# Altium PCB gpa-mgs-485.PcbDoc
Units mm, origin at the board's own origin, x right, y up, seen from the top; angles counter-clockwise.
Board outline 22 x 18 mm, 4 copper layers (Top Layer, Signal Layer 2, Signal Layer 1, Bottom Layer), stack 1.54 mm thick; 30 components, 27 nets, 114 pads, 79 vias.
Unrouted connection lines stored in the file: 3.
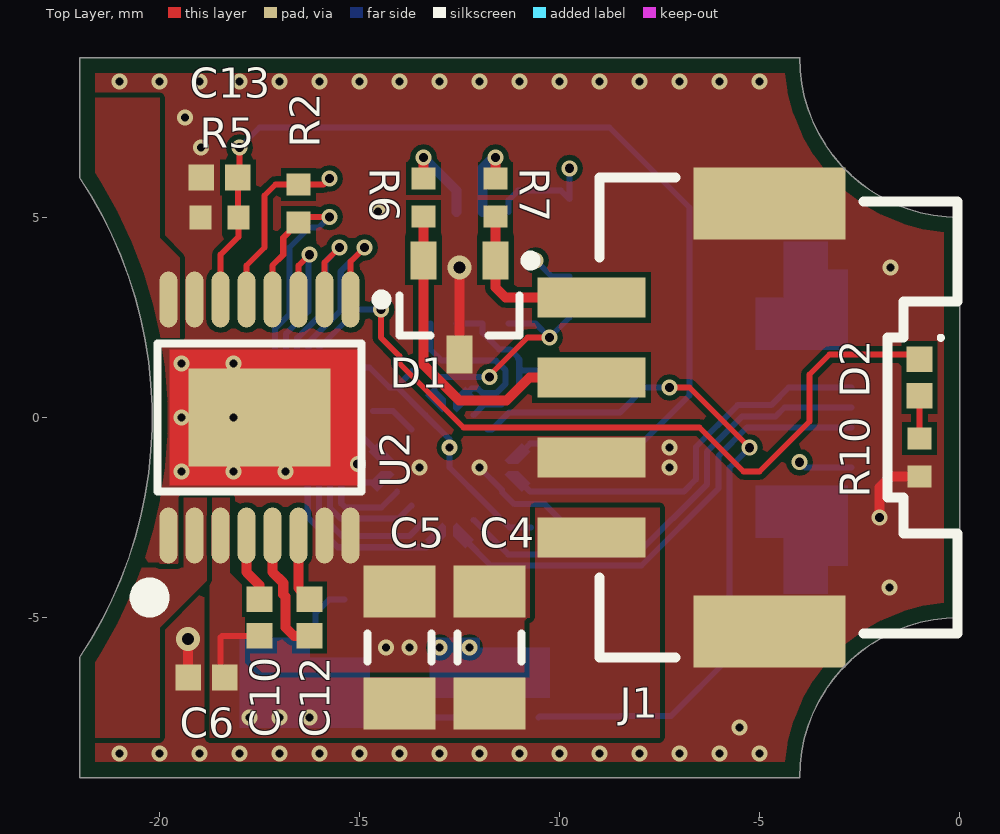
[diagram p0: Top Layer view]
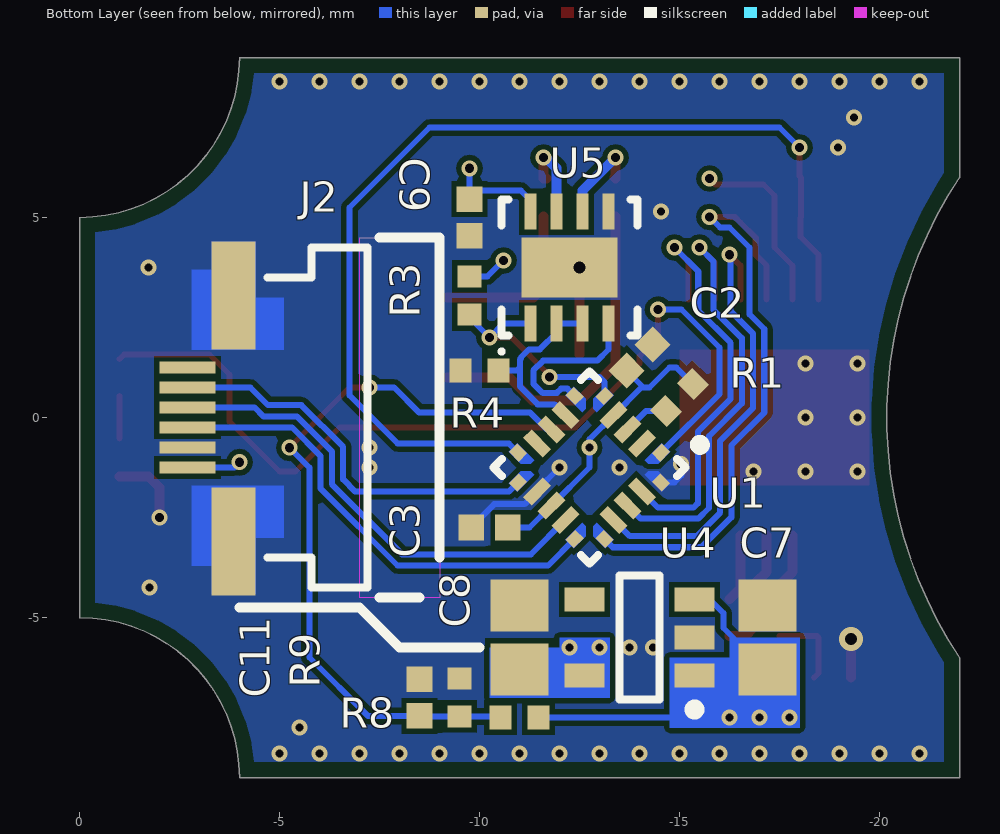
[diagram p1: Bottom Layer view, seen from below]
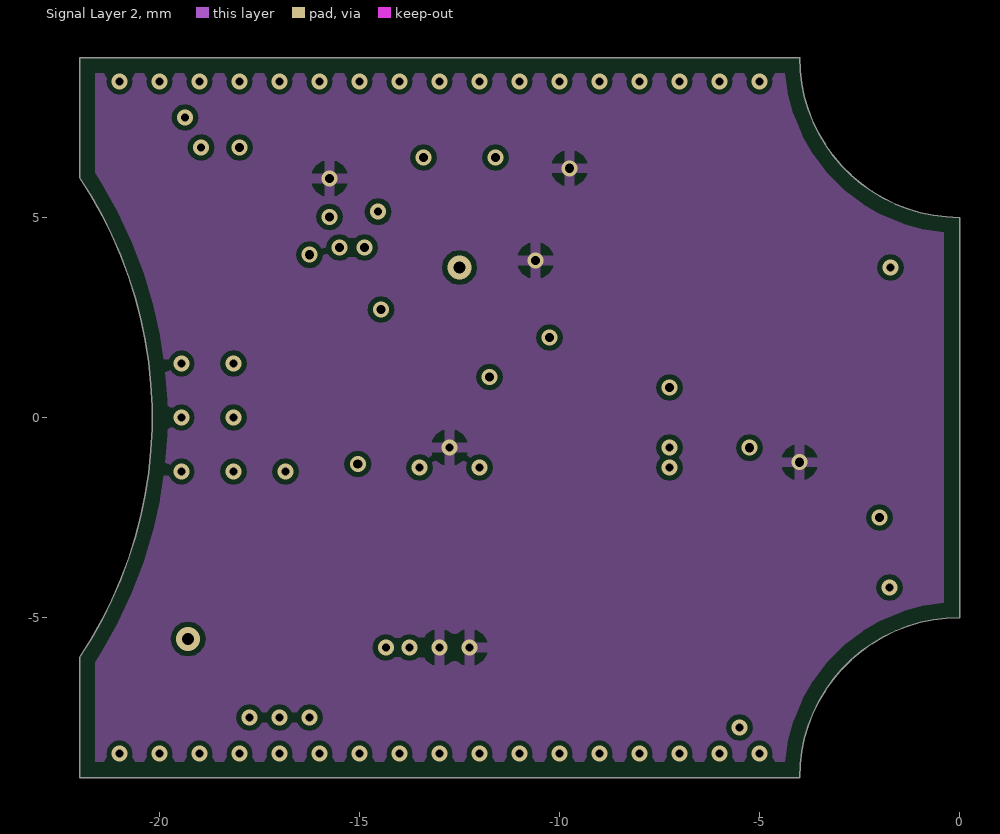
[diagram p2: Signal Layer 2]
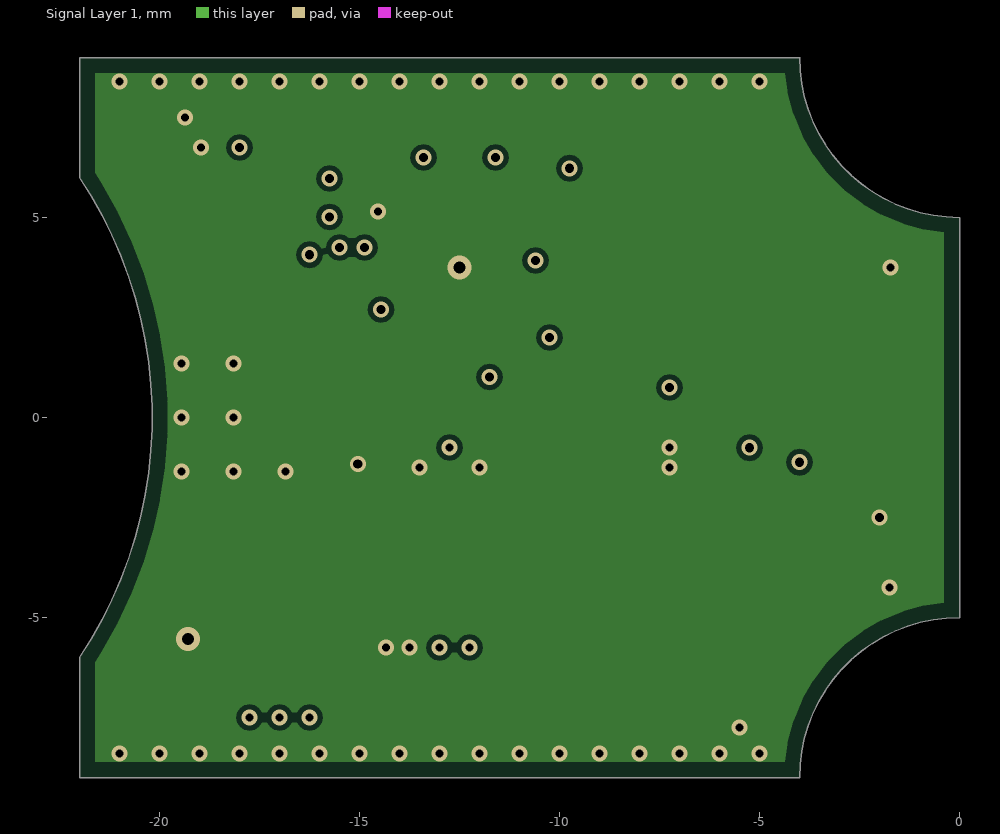
[diagram p3: Signal Layer 1]
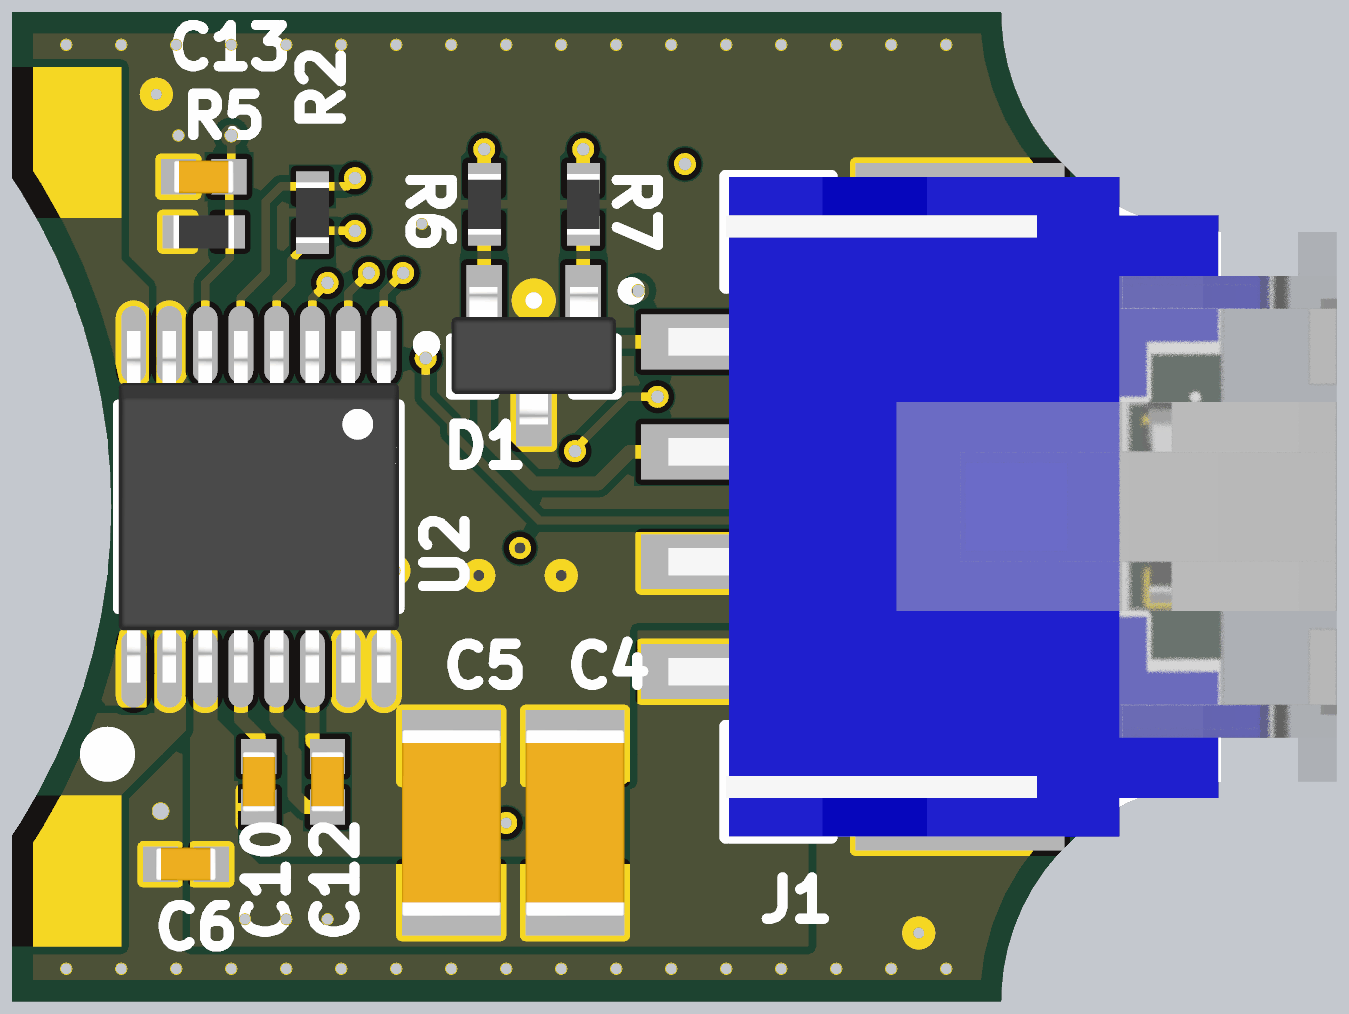
[diagram p4: 3D render of the assembled board from above, using the file's embedded part models]
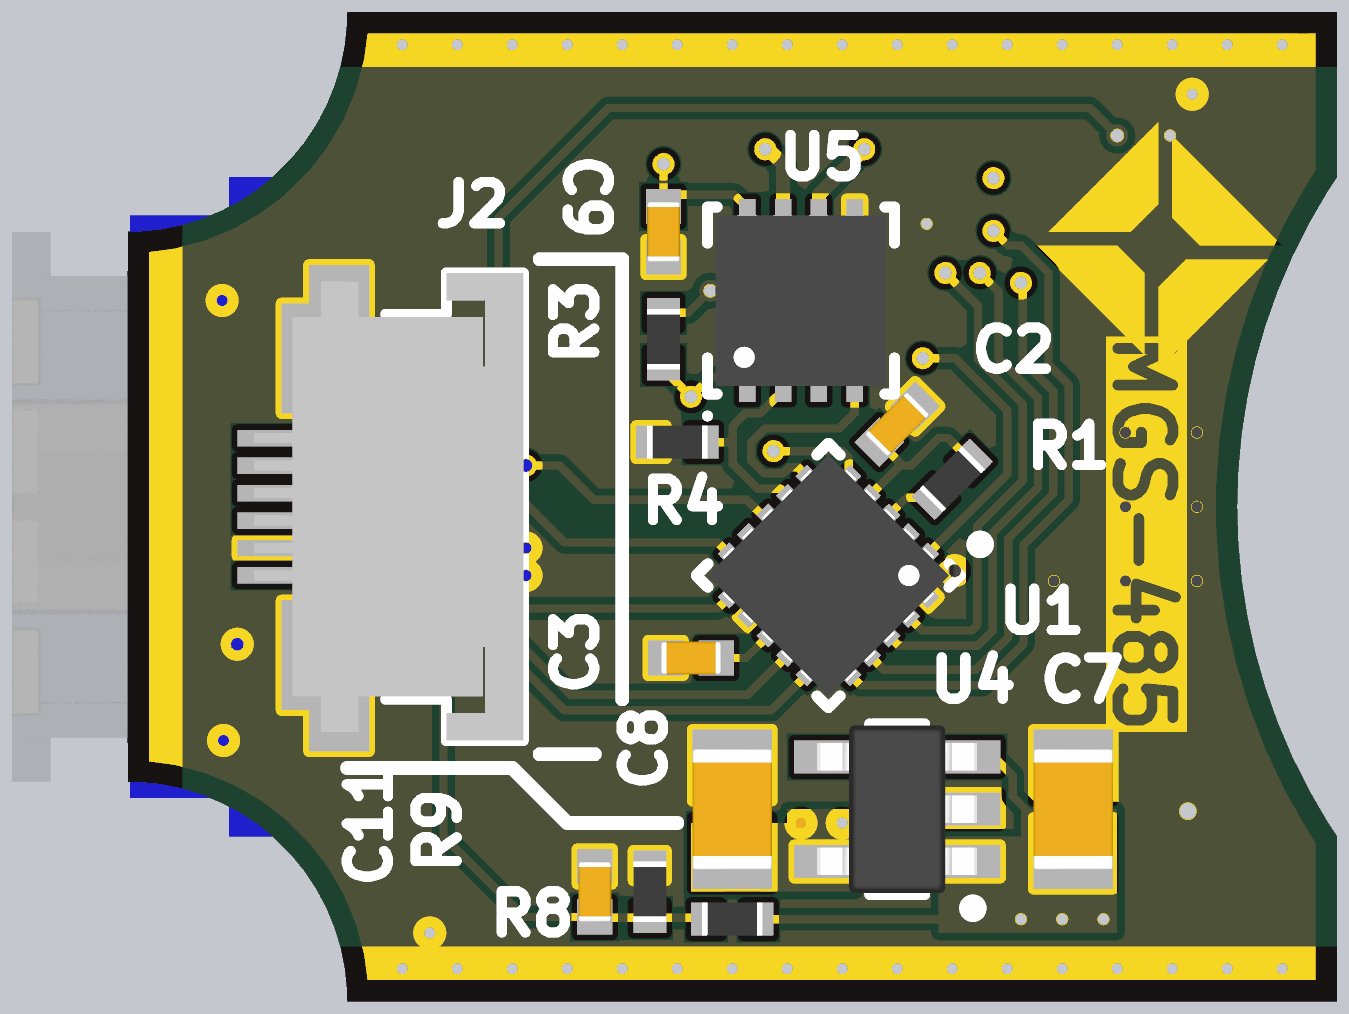
[diagram p5: 3D render of the assembled board from below, using the file's embedded part models]

## Layer stack, top to bottom
Top Solder: solder mask 0.025, Solder Resist, Dk 3.5
Top Layer: signal copper 0.018
Dielectric 1: prepreg 0.362, FR-4, Dk 4.2
Signal Layer 2: signal copper 0.035
Dielectric 3: core 0.71, Dk 4.2
Signal Layer 1: signal copper 0.035
Dielectric 2: prepreg 0.362, Dk 4.2
Bottom Layer: signal copper 0.018
Bottom Solder: solder mask 0.025, Solder Resist, Dk 3.5

## Board outline
-22,-9 -22,-6 ccw(c-31,0) -22,6 -22,9 -4,9 ccw(c0,9) 0,5 0,-5 ccw(c0,-9) -4,-9

## Design rules (kind name [scope] priority, off if disabled: settings)
BoardOutlineClearance [All] p1: gap=0.384 ignorepadtopadclearanceinfootprint=FALSE
Clearance [All] p1: gap=0.127 ignorepadtopadclearanceinfootprint=FALSE
MinimumSolderMaskSliver [All] p1: minsoldermaskwidth=0.051
PolygonConnect PolygonConnect_GND [IsPolygon and InNet('GND')] p1: thpad.connectstyle=Relief thpad.reliefconductorwidth=0.254 thpad.reliefentries=4 thpad.polygonreliefangle="90 Angle" thpad.airgapwidth=0.254 smdpad.connectstyle=Direct smdpad.reliefconductorwidth=0.254 smdpad.reliefentries=4 smdpad.polygonreliefangle="90 Angle" smdpad.airgapwidth=0.254 via.connectstyle=Direct via.reliefconductorwidth=0.254 via.reliefentries=4 via.polygonreliefangle="90 Angle" via.airgapwidth=0.254
PolygonConnect PolygonConnect_GND_L01_P013 [All vs InPolygonClass('POWER')] p2: connectstyle=Direct reliefconductorwidth=0.254 reliefentries=4 polygonreliefangle="90 Angle" airgapwidth=0.254
PolygonConnect [All] p3: connectstyle=Relief reliefconductorwidth=0.254 reliefentries=4 polygonreliefangle="90 Angle" airgapwidth=0.254
RoutingVias [All] p1: holewidth=0.3 width=0.6 viastyle="Through Hole" minholewidth=0.2 minwidth=0.4 maxholewidth=5 maxwidth=5
SilkToSilkClearance [All] p1: silktosilkclearance=0.2
SilkToSolderMaskClearance [IsPad] p1: minsilkscreentomaskgap=0.1 clearancetoexposedcopper=TRUE
SolderMaskExpansion [All] p1: expansion=0.102
Width [All] p1: maxlimit=2.54 minlimit=0.127 preferedwidth=0.152
27 further rules are at their usual default settings.

## Classes and differential pairs
polygon class POWER: GND_L01_P013 MOTOR_A_L01_P015 MOTOR_B_L01_P017 VM_7V4_L01_P019
component class RS485: C7 C8 C9 C11 D1 J1 R3 R4 R6 R7 R8 R9 U4 U5
component class DRV: C4 C5 C6 C10 C12 C13 R2 R5 U2
component class CTL: C2 C3 D2 J2 R1 R10 U1

## Components (designator, comment, footprint, x,y, rotation, side; value= is the part's Value field where it differs from the comment)
C2 "cap" CAPC1005X06N -14,1.5 r315 bottom value=100n
C3 "cap" CAPC1005X06N -10.25,-2.75 r180 bottom value=100n
C4 "cap" CAPC3216X14N -11.75,-5.75 r270 top value=10u
C5 "cap" CAPC3216X14N -14,-5.75 r270 top value=10u
C6 "cap" CAPC1005X06N -18.825,-6.5 r0 top value=100n
C7 "cap" CAPC2012X11N -17.2,-5.5 r270 bottom value=1u
C8 "cap" CAPC2012X11N -11,-5.5 r270 bottom value=1u
C9 "cap" CAPC1005X06N -9.75,5 r270 bottom value=100n
C10 "cap" CAPC1005X06N -17.5,-5 r270 top value=100n
C11 "cap" CAPC1005X06N -8.5,-7 r270 bottom value=100n
C12 "cap" CAPC1005X06N -16.25,-5 r90 top value=22n
C13 "cap" CAPC1005X06N -18.5,6 r0 top value=100n
D1 "BAS40-6" SOT23_CA -12.5,2.75 r270 top
D2 "led" CAPCP1005X06N -1,1 r270 top value=RED
J1 "1x4" sm04b-pass -8,0 r270 top locked
J2 "SFV6R-2STE1HLF" SFV6R-2STE1HLF -3,0 r90 bottom
R1 "res" RESC1005X04N -15,0.5 r135 bottom value=10K
R2 "res" RESC1005X04N -16.525,5.35 r90 top value=10K
R3 "res" RESC1005X04N -9.75,3.05 r90 bottom value=10K
R4 "res" RESC1005X04N -10,1.175 r180 bottom value=10K
R5 "res" RESC1005X04N -18.5,5 r0 top value=10K
R6 "res" RESC1005X04N -13.4,5.5 r90 top value=10K
R7 "res" RESC1005X04N -11.6,5.5 r90 top value=10K
R8 "res" RESC1005X04N -11,-7.5 r180 bottom value=10K
R9 "res" RESC1005X04N -9.5,-7 r270 bottom value=1K
R10 "res" RESC1005X04N -1,-1 r90 top value=10K
U1 "STM32L011F4" QFN50P300X300X60-20N -12.75,-1.25 r315 bottom locked
U2 "DRV8874" TSOP65P640X120_HS-17N_DRV8874 -17.5,0 r270 top
U4 "595-TPS7A0512PDBVR" SOT95P280X145-5N -14,-5.5 r0 bottom
U5 "SN65HVD72" SON65P300X100_HS-9N -12.25,3.75 r90 bottom

## Footprints (in the part's own frame and the unit in brackets; to place one, negate y for a bottom-side part, rotate by r counter-clockwise, add the part's x,y. Pads: shape width x height; smd on the part's side, far side on the other; paste and mask are expansions set on the pad)
CAPC1005X06N [mm] "Chip Capacitor, 2-Leads, Body 1.00x0.50mm, IPC Medium Density"
  rect 0.64x0.64 smd: 1(-0.46,0) 2(0.46,0)
  body extent -0.55,-0.3 0.55,0.3, height 0.6
CAPC2012X11N [mm] "Chip Capacitor, 2-Leads, Body 2.00x1.25mm, IPC Medium Density"
  rect 1.3x1.45 smd: 1(-0.8,0) 2(0.8,0)
  body extent -1.1,-0.73 1.1,0.72, height 1.1
CAPC3216X14N [mm] "Chip Capacitor, 2-Leads, Body 3.20x1.60mm, IPC Medium Density"
  rect 1.3x1.8 smd: 1(-1.4,0) 2(1.4,0)
  silkscreen extent -0.35,-0.8 0.35,0.8, body extent -1.7,-0.9 1.7,0.9, height 1.35
CAPCP1005X06N [mm] "Chip Capacitor, 2-Leads, Body 1.00x0.50mm, IPC Medium Density"
  rect 0.64x0.64 smd: 1(-0.46,0) 2(0.46,0)
  silkscreen extent -1.04,0.48 -0.94,0.58, body extent -0.5,-0.25 0.5,0.25, height 0.5
QFN50P300X300X60-20N [mm] "QFN, 20-Leads, Body 3.00x3.00mm, Pitch 0.50mm, IPC Medium Density"
  rect 0.35x0.3 smd: 1(-1.525,1) 5(-1.525,-1) 11(1.525,-1) 15(1.525,1)
  rect 0.7x0.3 smd: 2(-1.35,0.5) 3(-1.35,0) 4(-1.35,-0.5) 12(1.35,-0.5) 13(1.35,0) 14(1.35,0.5)
  rect 0.3x0.35 smd: 6(-1,-1.525) 10(1,-1.525) 16(1,1.525) 20(-1,1.525)
  rect 0.3x0.7 smd: 7(-0.5,-1.35) 8(0,-1.35) 9(0.5,-1.35) 17(0.5,1.35) 18(0,1.35) 19(-0.5,1.35)
  Top Layer region: -0.85,-1.7 -0.85,-1.1 -0.975,-1.1 -1.15,-1.275 -1.15,-1.7
  Top Layer region: -1.7,-0.85 -1.1,-0.85 -1.1,-0.975 -1.275,-1.15 -1.7,-1.15
  Top Layer region: -1.7,0.85 -1.1,0.85 -1.1,0.975 -1.275,1.15 -1.7,1.15
  Top Layer region: -0.85,1.7 -0.85,1.1 -0.975,1.1 -1.15,1.275 -1.15,1.7
  Top Layer region: 0.85,1.7 0.85,1.1 0.975,1.1 1.15,1.275 1.15,1.7
  Top Layer region: 1.7,0.85 1.1,0.85 1.1,0.975 1.275,1.15 1.7,1.15
  Top Layer region: 0.85,-1.7 0.85,-1.1 0.975,-1.1 1.15,-1.275 1.15,-1.7
  Top Layer region: 1.7,-0.85 1.1,-0.85 1.1,-0.975 1.275,-1.15 1.7,-1.15
  silkscreen extent -2.47,-1.7 1.7,1.7, body extent -1.6,-1.6 1.6,1.6, height 0.6
RESC1005X04N [mm] "Chip Resistor, 2-Leads, Body 1.05x0.54mm, IPC Medium Density"
  rect 0.55x0.6 smd: 1(-0.475,0) 2(0.475,0)
  body extent -0.55,-0.3 0.55,0.3, height 0.4
SFV6R-2STE1HLF [mm] "CONN FFC FPC TOP 6POS 0.50MM R/A"
  rect 0.3x1.4 smd: 1(-1.25,0.3) 2(-0.75,0.3) 3(-0.25,0.3) 4(0.25,0.3) 5(0.75,0.3) 6(1.25,0.3)
  rect 2.7x1.1 smd: ANCHOR(-3.1,-0.85) ANCHOR(3.05,-0.85)
  Top Layer region: 1.7,0.2 3.7,0.2 3.7,-0.3 4.4,-0.3 4.4,-1.4 3,-1.4 3,-2.1 1.7,-2.1
  Top Layer region: -1.7,0.2 -3.7,0.2 -3.7,-0.3 -4.4,-0.3 -4.4,-1.4 -3,-1.4 -3,-2.1 -1.7,-2.1
  silkscreen extent -4.25,-4.2 4.25,-1.7, body extent -4.25,-4.2 4.25,0.7, height 1.87
sm04b-pass [mm]
  rect 1x2.7 smd: 1(-3,-1.2) 2(-1,-1.2) 3(1,-1.2) 4(3,-1.2)
  rect 1.8x3.8 smd: ANCHOR(-5.35,3.25) ANCHOR(5.35,3.25)
  silkscreen extent -6,-1 6,7.95, body extent -6,-2.05 9,12, height 6.3
SON65P300X100_HS-9N [mm] "SON, 8-Leads, Body 3,00x3,00mm, Pitch 0,65mm, Thermal Pad 2,40x1,49mm, IPC Medium Density"
  rect 0.9x0.3 smd: 1(-1.395,0.975) 2(-1.395,0.325) 3(-1.395,-0.325) 4(-1.395,-0.975) 5(1.395,-0.975) 6(1.395,-0.325) 7(1.395,0.325) 8(1.395,0.975)
  rect 1.49x2.4 smd: 9(0,0)
  silkscreen extent -2.15,-1.7 1.7,1.75, body extent -1.55,-1.55 1.55,1.55, height 1
SOT23_CA [mm] "SOT23, 3-Leads, Body 2.90x2.40mm, Pitch 0.90mm, IPC Medium Density"
  rect 0.95x0.65 smd: A(1.175,0) C1(-1.175,0.9) C2(-1.175,-0.9)
  silkscreen extent -1.3,-1.5 0.7,1.9, body extent -1.25,-1.5 1.25,1.5, height 1
SOT95P280X145-5N [mm] "SOT23, 5-Leads, Body 2,90x2,80mm, Pitch 0,95mm, IPC Medium Density"
  rect 1x0.6 smd: 1(-1.375,0.95) 2(-1.375,0) 3(-1.375,-0.95) 4(1.375,-0.95) 5(1.375,0.95)
  silkscreen extent -1.5,-1.55 0.5,1.92, body extent -1.47,-1.53 1.47,1.53, height 1.45
TSOP65P640X120_HS-17N_DRV8874 [mm] "TSOP, 16-Leads, Body 5.00x4.40mm, Pitch 0.65mm, Thermal Pad 3.55x2.46mm, IPC Medium Density"
  oval 1.4x0.45 smd: 1(-2.95,2.275) 2(-2.95,1.625) 3(-2.95,0.975) 4(-2.95,0.325) 5(-2.95,-0.325) 6(-2.95,-0.975) 7(-2.95,-1.625) 8(-2.95,-2.275) 9(2.95,-2.275) 10(2.95,-1.625) 11(2.95,-0.975) 12(2.95,-0.325) 13(2.95,0.325) 14(2.95,0.975) 15(2.95,1.625) 16(2.95,2.275)
  rect 2.46x3.55 smd paste-5: 17(0,0)
  Top Layer region: -1.7,-2.25 1.7,-2.25 1.7,2.5 -1.7,2.5
  silkscreen extent -3.07,-2.55 1.85,3.17, body extent -3.2,-2.55 3.2,2.55, height 1.2

## Part data
C2 C3 C4 C5 C6 C7 C8 C9 C10 C11 C12 C13: "Capacitor"
D1: library part diode_dual_ca, "Diode Common Anode"
D2: "LED"
J1: library part sm04b-pass, "2.0mm pitch/Wire-to-board (Crimp style/IDC) / Wire-to-wire (Crimp style/IDC)", ComponentLink1Description=Datasheet, ComponentLink1URL=http://www.jst-mfg.com/product/pdf/eng/ePA-F.pdf
J2: library part sfv6r-2ste1hlf, "6 Position FFC, FPC Connector Contacts, Top 0.020\" (0.50mm) Surface Mount, Right Angle", ComponentLink1Description=Datasheet, ComponentLink1URL=https://cdn.amphenol-icc.com/media/wysiwyg/files/drawing/10112793.pdf
R1 R2 R3 R4 R5 R6 R7 R8 R9 R10: "Resistor"
U1: library part stm32l011f4u
U2: library part drv8874, "H-Bridge Motor Driver With Integrated Current Sense and Regulation", ComponentLink1Description=Datasheet, ComponentLink1URL=http://www.ti.com/lit/gpn/drv8874
U4: library part tps7a0512pdbvr, "TPS7A05 1-µA Ultralow IQ, 200-mA, Low-Dropout Regulator", ComponentLink1Description=datasheet, ComponentLink1URL=http://www.ti.com/lit/ds/symlink/tps7a05.pdf?HQS=TI-null-null-mousermode-df-pf-null-wwe&DCM=yes&ref_url=https%3A%2F%2Fwww.mouser.se%2F
U5: library part sn65hvd72, "3.3-V Supply RS-485 With IEC ESD Protection", Supplier Part Number 1=296-40520-1-ND, ComponentLink1Description=Datasheet, ComponentLink1URL=http://www.ti.com/lit/ds/symlink/sn65hvd72.pdf, Supplier 1=Digi-Key

## Via types
v1: diameter 0.4, hole 0.2, Top Layer to Bottom Layer, tented both sides, 46 vias
v2: diameter 0.4, hole 0.23, Top Layer to Bottom Layer, 16 vias
v3: diameter 0.4, hole 0.2, Top Layer to Bottom Layer, 13 vias
v4: diameter 0.4, hole 0.23, Top Layer to Bottom Layer, tented both sides, 2 vias
v5: diameter 0.6, hole 0.3, Top Layer to Bottom Layer, 1 vias
v6: diameter 0.6, hole 0.3, Top Layer to Bottom Layer, tented both sides, 1 vias

## Nets (pads, with @x,y where several pads share a name; then routed paths per layer and width w, separated by ;. In a path a pad name is that pad's centre, name@x,y a point inside that pad or via, vN(x,y) a via of type N, cw(c..) or ccw(c..) an arc to the next point about the centre after c; other vN are vias at no path point)
\RST: R1.1 U1.3 | length 1.1
  Bottom Layer w0.152: R1.1 -14.164,0.164 U1.3
A: R6.2 U5.6 | length 2.2
  Top Layer w0.254: R6.2 -13.375,6 -13.4,6.025 v2(-13.4,6.5)
  Bottom Layer w0.254: v2(-13.4,6.5) -12.575,5.675 U5.6
B: R7.2 U5.7 | length 2.1
  Top Layer w0.254: R7.2 -11.669,5.975 -11.6,6.044 v2(-11.6,6.5)
  Bottom Layer w0.254: U5.7 -11.925,6.231 -11.656,6.5 v2(-11.6,6.5)
FAULT: R2.1 U1.16 U2.4 | length 15.2
  Top Layer w0.152: U2.4 -17.175,3.801 -16.906,4.07 -16.906,4.494 R2.1 -16.385,5.015 v2(-15.75,5.015)
  Bottom Layer w0.152: v2(-15.75,5.015) -16.015,4.75 -16.25,4.75 -16.75,4.25 -16.75,2.581 -17.118,2.213 -17.118,0.123 -16.295,-0.699 -16.295,-2.493 -15.545,-3.244 -13.33,-3.244 U1.16
GND: C2.1 C3.1 C4.1 C5.1 C6.1 C7.1 C8.1 C9.2 C11.1 C13.1 D1.A J1.3 J1.ANCHOR J2.2 J2.ANCHOR R4.1 R5.1 R9.1 R10.1 U1.12 U1.20 U2.7 U2.9 U2.15 U2.16 U2.17 U4.2 U5.5 U5.9 | length 8.9
  Top Layer w0.152: v3@-13.588,-1.162 v3(-13.5,-1.25)
  Top Layer w0.254: C6.1 v6(-19.285,-5.535) ; D1.A v5(-12.5,3.75) ; v2(-2,-2.5) -2,-1.75 -1.725,-1.475 R10.1
  Bottom Layer w0.152: v2(-15.043,-1.162) -15.043,-1.447 -14.869,-1.621 U1.20 ; v3(-12,-1.25) -11.442,-1.808 U1.12 -11.127,-2.166 -10.367,-2.166 -9.79,-2.743 C3.1
  other v1: -21,-8.4 -20,-8.4 -19,-8.4 -18,-8.4 -17,-8.4 -16,-8.4 -15,-8.4 -14,-8.4 -13,-8.4 -12,-8.4 -11,-8.4 -10,-8.4 -9,-8.4 -8,-8.4 -7,-8.4 -6,-8.4 -5,-8.4 -19.45,-1.35 -18.15,-1.35 -16.85,-1.35 -19.45,0 -18.15,0 -19.45,1.35 -18.15,1.35 -14.535,5.145 -18.96,6.75 -21,8.4 -20,8.4 -19,8.4 -18,8.4 -17,8.4 -16,8.4 -15,8.4 -14,8.4 -13,8.4 -12,8.4 -11,8.4 -10,8.4 -9,8.4 -8,8.4 -7,8.4 -6,8.4 -5,8.4
  other v3: -5.5,-7.75 -14.341,-5.75 -13.75,-5.75 -1.75,-4.25 -7.25,-1.25 -7.25,-0.75 -1.725,3.75 -19.363,7.5
ISENS: C13.2 R5.2 U1.10 U2.6 | length 25.8
  Top Layer w0.152: U2.6 -18.475,4.07 -18.025,4.52 R5.2 -18.04,5.015 C13.2 -18,6.04 v4(-18,6.75)
  Bottom Layer w0.152: v4(-18,6.75) -17.5,7.25 -8.75,7.25 -6.75,5.25 -6.75,0.553 -7.952,-0.649 -10.735,-0.649 U1.10
LED: D2.1 U1.1 | length 22.8
  Top Layer w0.152: v2(-14.465,2.7) -14.465,2 -14,1.535 -14,1.35 -12.4,-0.25 -6.5,-0.25 -5.4,-1.35 -5,-1.35 -3.75,-0.1 -3.75,1.075 -3.25,1.575 -1.115,1.575 D2.1
  Bottom Layer w0.152: U1.1 -16,0.586 -16,1.75 -15.05,2.7 v2(-14.465,2.7)
MOTOR_A: U2.8
MOTOR_B: U2.10
NC/VREF: J2.5 U1.11 | length 9.9
  Bottom Layer w0.152: U1.11 -10.735,-1.851 -6.891,-1.851 -6.588,-1.548 -6.588,-0.733 -5.547,0.309 -4.712,0.309 -4.271,0.75 J2.5
NetC10_1: C10.1 U2.12 | length 1.7
  Top Layer w0.254: U2.12 -17.825,-3.866 -17.5,-4.191 C10.1
NetC12_1: C12.1 U2.13 | length 3.1
  Top Layer w0.254: U2.13 -17.175,-3.866 -16.906,-4.135 -16.906,-4.423 -16.85,-4.479 -16.85,-5.25 -16.64,-5.46 C12.1
NetC12_2: C12.2 U2.14 | length 1.7
  Top Layer w0.254: U2.14 -16.525,-4.265 C12.2
NetD2_C: D2.2 R10.2 | length 1.1
  Top Layer w0.152: R10.2 D2.2
NetU1_18: U1.18 U2.2 | length 11
  Top Layer w0.152: U2.2 -15.875,3.875 v2(-15.5,4.25)
  Bottom Layer w0.152: v2(-15.5,4.25) -15.847,3.903 -15.847,2.693 -16.559,1.981 -16.559,0.354 -15.737,-0.468 -15.737,-2.262 -15.469,-2.529 -14.029,-2.529 U1.18
NetU1_19: U1.19 U2.1 | length 10.4
  Top Layer w0.152: U2.1 -15.225,3.899 v2(-14.874,4.25)
  Bottom Layer w0.152: v2(-14.874,4.25) -15.469,3.655 -15.469,2.676 -16.279,1.866 -16.279,0.47 -15.457,-0.352 -15.457,-2.146 -15.353,-2.25 -14.457,-2.25 U1.19
RS485_A: D1.C2 J1.2 R6.1 | length 8.5
  Top Layer w0.254: R6.1 D1.C2 -13.4,1.316 -12.51,0.426 -11.324,0.426 -10.75,1 J1.2
RS485_B: D1.C1 J1.1 R7.1 | length 4.3
  Top Layer w0.254: R7.1 D1.C1 -11.6,3.25 -11.35,3 J1.1
RTS: R4.2 U1.7 U5.2 U5.3 | length 4.8
  Bottom Layer w0.152: U5.3 U5.2 -11.925,2.118 -11.509,1.702 -11.237,1.702 -11.035,1.5 -11.035,1.481 -11.007,1.453 -11.007,1.25 ; U1.7 -11.878,0.329 -11.456,0.329 -11.007,0.778 -11.007,1.25 ; R4.2 -10.932,1.175 -11.007,1.25
RX: R3.1 U1.5 U5.1 | length 5.7
  Top Layer w0.152: v2(-11.75,1.012) -11.75,1.05 -10.8,2 v2(-10.25,2)
  Bottom Layer w0.152: U1.5 -13.121,0.891 -13.001,1.012 v2(-11.75,1.012) ; U5.1 -10.605,2.355 v2(-10.25,2) -9.75,2.5 R3.1
SCL/LIM: J2.4 U1.14 | length 11.8
  Bottom Layer w0.152: U1.14 -11.287,-3.421 -8.066,-3.421 -6.309,-1.664 -6.309,-0.848 -5.431,0.029 -4.596,0.029 -4.376,0.25 J2.4
SDA/VPOT: J2.3 U1.15 | length 11.9
  Bottom Layer w0.152: U1.15 -11.714,-3.7 -7.95,-3.7 -6.029,-1.779 -6.029,-0.964 -5.315,-0.25 J2.3
SLEEP: U1.17 U2.3 | length 11.3
  Top Layer w0.152: U2.3 -16.525,3.795 v2(-16.25,4.07)
  Bottom Layer w0.152: v2(-16.25,4.07) -16.259,4.07 -16.279,4.05 -16.279,2.656 -16.838,2.097 -16.838,0.239 -16.016,-0.584 -16.016,-2.378 -15.429,-2.965 -13.758,-2.965 U1.17
TX: U1.6 U5.4 | length 4.3
  Bottom Layer w0.152: U5.4 -13.225,1.7 -12.947,1.422 -11.59,1.422 -11.347,1.179 -11.347,0.883 -11.347,0.845 -11.583,0.609 -11.917,0.609 -11.923,0.615 -11.935,0.615 -12.041,0.721 -12.194,0.721 U1.6
VM_7V4: C4.2 C5.2 C6.2 C7.2 C10.2 J1.4 R8.2 U2.11 U4.1 U4.3 | length 9.6
  Top Layer w0.152: C6.2 -18.475,-6.39 -18.475,-5.5 -18.435,-5.46 C10.2
  Bottom Layer w0.152: C7.2 -17.138,-6.3 -16.1,-5.262 -16.1,-4.892 -15.758,-4.55 U4.3 ; v1(-16.25,-7.5) R8.2
  other v1: -17.75,-7.5 -17,-7.5
VMCU_3V3: C2.2 C3.2 C8.2 C9.1 J2.1 R1.2 R2.2 R3.2 U1.4 U1.13 U2.5 U4.5 U5.8 | length 18.9
  Top Layer w0.152: U2.5 -17.825,3.8 -17.375,4.25 -17.375,5.55 -17.1,5.825 R2.2 -15.9,5.825 v2(-15.75,5.975)
  Bottom Layer w0.152: R1.2 -14.922,1.25 -14.75,1.25 -14.25,0.75 -14.099,0.75 ; C2.2 -14.099,0.75 ; U4.5 -11.15,-6.45 C8.2 ; U5.8 -11.275,5.435 -11.035,5.675 -9.965,5.675 C9.1 v2(-9.75,6.231) ; C3.2 -11.25,-2.75 U1.13 -12.75,-1.25 v3(-12.75,-0.75) -12.75,-0.543 U1.4 -14.043,0.75 -14.099,0.75 ; v4(-10.6,3.927) -10.198,3.525 R3.2 ; v2(-4,-1.117) -3.867,-1.25 J2.1
  other v3: -13,-5.75 -12.25,-5.75
VSENS: C11.2 R8.1 R9.2 U1.8 | length 18.5
  Top Layer w0.152: v2(-7.25,0.75) -6.75,0.75 -5.25,-0.75 v2(-5.25,-0.755)
  Bottom Layer w0.152: U1.8 -11.685,-0.295 -11.261,0.129 -8.486,0.129 -7.865,0.75 v2(-7.25,0.75) ; R8.1 -10.5,-7.475 R9.2 -8.515,-7.475 C11.2 -7.21,-7.46 -5.75,-6 -5.75,-1.255 v2(-5.25,-0.755)
pads on no net: J2.6 U1.2 U1.9 U4.4

## Polygon pours and split planes (outlines as drawn)
GND on Bottom Layer "GND_L04_P027" (solid, pour order 27): -22,-9 -22,-6 ccw(c-31,0) -22,6 -22,9 -4,9 ccw(c0,9) 0,5 0,-5 ccw(c0,-9) -4,-9
GND on Bottom Layer "GND_L04_P024" (solid, pour order 24): 0,5 -1,5 -1,-5 0,-5
no net on Bottom Layer "NONET_L04_P009" (solid, pour order 9): -21.5,-7.5
GND on Bottom Layer "GND_L04_P003" (solid, pour order 3): 0,5 -1,5 -1,-5 0,-5
GND on Bottom Layer "GND_L04_P002" (solid, pour order 2): -22,9 -22,8 -3,8 -3,9
GND on Bottom Layer "GND_L04_P000" (solid, pour order 0): -22,-9 -22,-8 -3,-8 -3,-9
no net on Bottom Solder "GND_L01_P-001" (solid): 0,5
GND on Top Layer "GND_L01_P026" (solid, pour order 26): -22,-9 -22,-6 ccw(c-31,0) -22,6 -22,9 -4,9 ccw(c0,9) 0,5 0,-5 ccw(c0,-9) -4,-9
VM_7V4 on Top Layer "VM_7V4_L01_P019" (solid, pour order 19): -17.875,-6.125 -17.875,-4.25 -18.25,-3.875 -18.25,-2 -18.75,-2 -18.75,-8 -7.5,-8 -7.5,-2.25 -10.75,-2.25 -10.75,-6.5 -17.5,-6.5
MOTOR_B on Top Layer "MOTOR_B_L01_P017" (solid, pour order 17): -19.4,-2 -19.4,-3.75 -22,-3.75 -22,-8 -20,-8 -20,-5.25 -18.825,-4.075 -18.825,-2
MOTOR_A on Top Layer "MOTOR_A_L01_P015" (solid, pour order 15): -22,8 -20,8 -20,4.5 -19.5,4 -19.5,2 -20,2 -22,2
GND on Top Layer "GND_L01_P013" (solid, pour order 13): -15,-5 -15,-6 -13.5,-6 -13.5,-5 -10.75,-5 -10.75,-1.5 -7,-1.5 -7,-0.5 -12.5,-0.5 -14.75,1.75 -20,1.75 -20,-3.65 -19.55,-3.65 -19.55,-1.75 -16.25,-1.75 -16.25,-3.75 -15,-3.75
GND on Signal Layer 1 "GND_L03_P023" (solid, pour order 23): -22,-9 -22,-6 ccw(c-31,0) -22,6 -22,9 -4,9 ccw(c0,9) 0,5 0,-5 ccw(c0,-9) -4,-9
VMCU_3V3 on Signal Layer 2 "VMCU_3V3_L02_P025" (solid, pour order 25): -22,-9 -22,-6 ccw(c-31,0) -22,6 -22,9 -4,9 ccw(c0,9) 0,5 0,-5 ccw(c0,-9) -4,-9

## Keep-outs
Bottom Layer:
  rectangle: -9,-4.5 -7,4.5

## Other copper
Bottom Layer:
  region net VMCU_3V3: -13.25,-5.5 -12,-5.5 -12,-5.75 -10.25,-5.75 -10.25,-7 -13.25,-7
  region net VM_7V4: -18,-7.75 -18,-5.5 -16.25,-5.5 -16.25,-6 -14.75,-6 -14.75,-7.75

## Silkscreen, mask and mechanical layers (free items; w line width, h text height)
Top Overlay:
  circle w0.5: c-20.25,-4.5 r0.25
Bottom Overlay:
  lines w0.254: -10,-5.75 -8,-5.75 -7,-4.75 -4.25,-4.75 -4,-4.75 ; -9,-3.5 -9,4.5 -7.5,4.5 ; -8.5,-4.5 -7.5,-4.5
Top Solder:
  rectangle: -22,5.25 -20,8
  rectangle: -22,-8 -20,-5.25
Bottom Solder:
  rectangle: -1,-6 0,6
  rectangle: -22,8 -3,9
  rectangle: -22,-9 -3,-8
  region: -18.5,2.75 -18.5,4.25 -18,4.75 -16.5,4.75
  region: -16.75,5 -18.25,5 -18.75,5.5 -18.75,7
  region: -19,6.75 -19,5.25 -19.5,4.75 -21,4.75
  region: -20.75,4.5 -19.25,4.5 -18.75,4 -18.75,2.5
  text "MGS-485" at -18,3.25 h1 r90